# EAGLE board squematics (EAGLE 7.4.0)
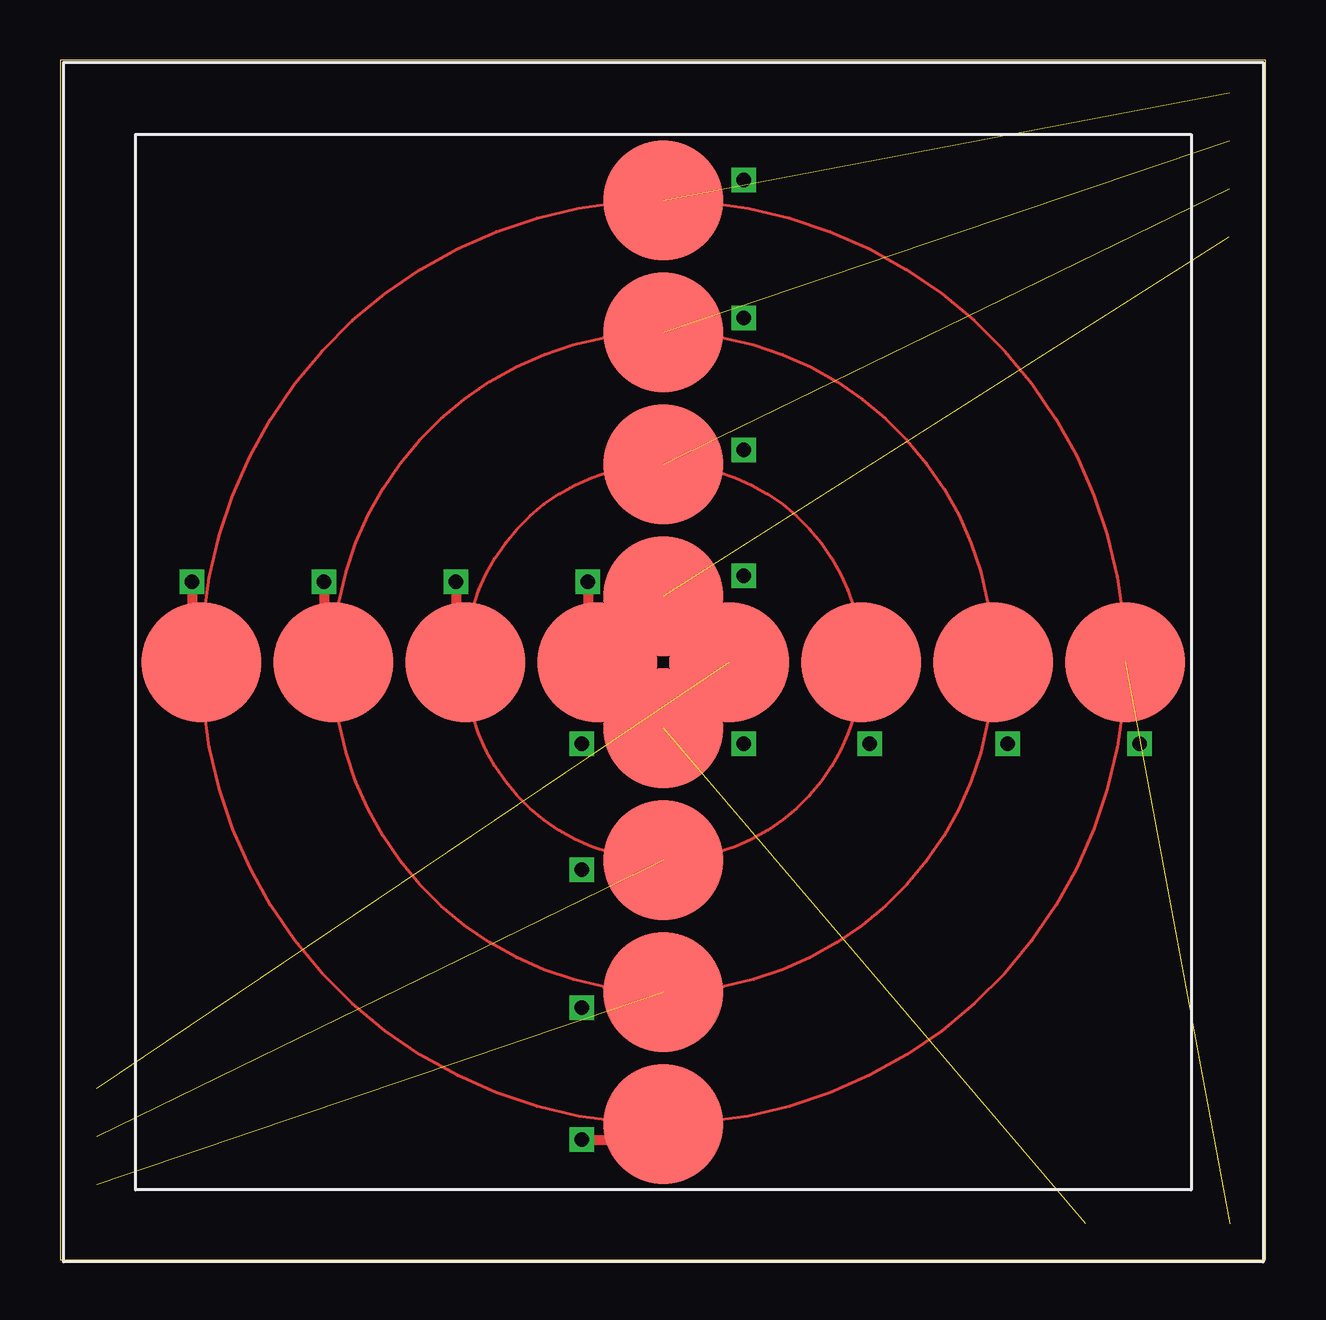
[diagram p0: board, top side]
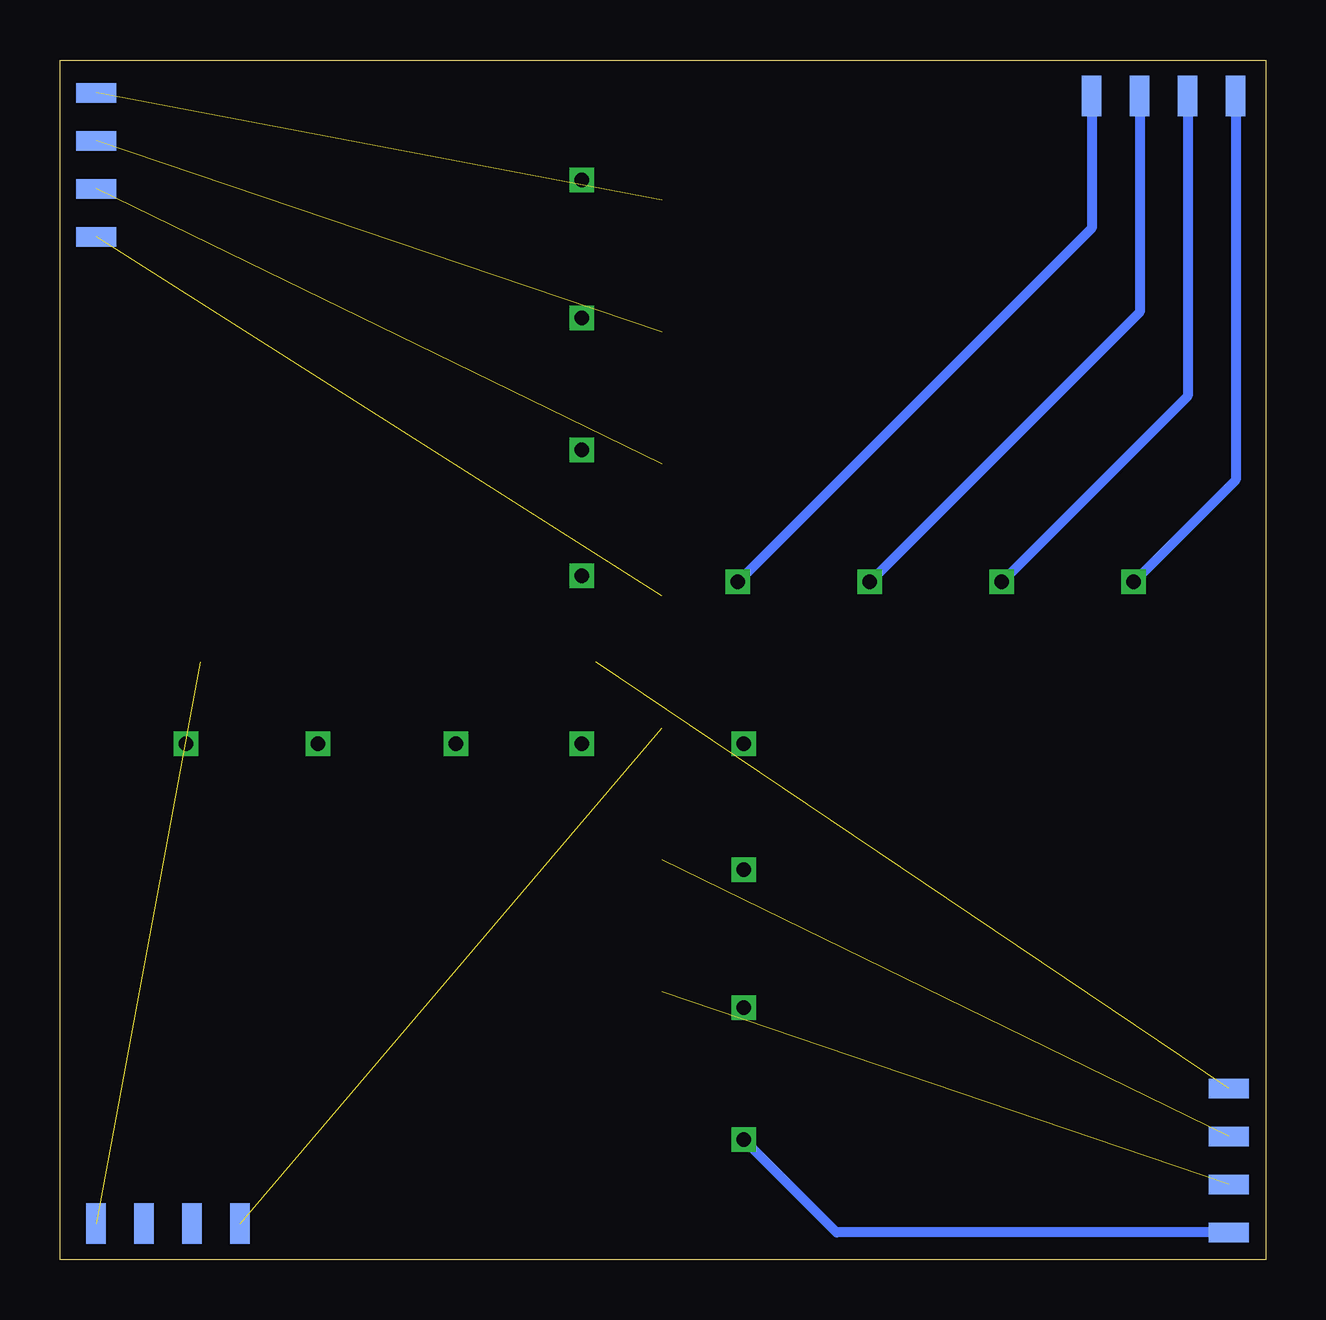
[diagram p1: board, bottom side, seen from below]

Size 50.25 x 50 mm. Coordinates in mm from the lower left corner, seen from the top.
Outline: 0,0 50.25,0 50.25,50 0,50 0,0
Copper layers (1*16): Top 0.035mm / dielectric 1.5mm / Bottom 0.035mm
Design rules "default": minimum track width 10mil, minimum drill 24mil, track to track 8mil, track to pad 8mil, pad to pad 8mil, via to via 8mil, smd to smd 8mil, copper to edge 40mil, drill to drill 8mil, minimum pad ring 10mil, minimum via ring 8mil, stop-mask expansion 4mil, vias tented up to drill 0mil, thermal gap 10mil

## Footprints (pad centres in the part's own frame; a part is rotated, then mirrored left to right if it is on the bottom)
FOUR_SIDE_PINS = smd 1.676 x 0.813: 5V 0,-4; GND 0,-2; SCL 0,2; SDA 0,0
CONNECTORS_PIN = smd 5 x 5: 5V_EAST 19.25,0; 5V_NORTH 0,19.25; 5V_SOUTH 0,-19.25; 5V_WEST -19.25,0; GND_EAST 13.75,0; GND_NORTH 0,13.75; GND_SOUTH 0,-13.75; GND_WEST -13.75,0; SDA_EAST 8.25,0; SDA_NORTH 0,8.25; SDA_SOUTH 0,-8.25; SDA_WEST -8.25,0; SLC_EAST 2.75,0; SLC_NORTH 0,2.75; SLC_SOUTH 0,-2.75; SLC_WEST -2.75,0

## Placement (x,y rotation side)
EAST  FOUR_SIDE_PINS  [FOUR_SIDE_PINS]  1.53,5.13 0 bottom
NORTH  FOUR_SIDE_PINS  [FOUR_SIDE_PINS]  48.74,44.63 180 bottom
U$1  CONNECTORS_PIN_DEVICE  [CONNECTORS_PIN]  25.15,24.9 0 top
U$2  FOUR_SIDE_PINS  [FOUR_SIDE_PINS]  5.25,48.5 90 bottom
U$3  FOUR_SIDE_PINS  [FOUR_SIDE_PINS]  44.75,1.5 270 bottom

## Library data of the parts
EAST NORTH U$2 U$3 = probatio_fourSidePins
U$1 = probatioBaseConnector

## Nets
N$1: NORTH.SCL U$1.SLC_NORTH
N$2: NORTH.SDA U$1.SDA_WEST
N$3: NORTH.GND U$1.GND_WEST
N$4: NORTH.5V U$1.5V_NORTH
N$5: EAST.SCL U$1.SLC_EAST
N$6: EAST.SDA U$1.SDA_EAST
N$7: EAST.GND U$1.GND_EAST
N$8: EAST.5V U$1.5V_EAST
N$9: U$1.5V_WEST U$2.5V
N$10: U$1.SLC_WEST U$2.SCL
N$11: U$1.SDA_SOUTH U$2.SDA
N$12: U$1.GND_SOUTH U$2.GND
N$13: U$1.5V_SOUTH U$3.5V
N$14: U$1.SLC_SOUTH U$3.SCL

## Tracks (layer width: path | path; a pad name or v marks a point on that pad's centre or on a via)
N$1  (1 unrouted)
N$2  (1 unrouted)
N$3  (1 unrouted)
N$4  (1 unrouted)
N$5  (1 unrouted)
N$6  (1 unrouted)
N$7  (1 unrouted)
N$8  (via drill 0.6)
  Top 0.406: v21.75,5 24.5,5 25.15,5.65
  Bottom 0.406: EAST.5V 17.88,1.13 v21.75,5
N$9  (via drill 0.6)
  Top 0.406: v5.5,28.25 5.5,25.3 U$1.5V_WEST
  Bottom 0.406: U$2.5V 1.25,32.5 v5.5,28.25
N$10  (via drill 0.6)
  Top 0.406: v22,28.25 22,25.3 U$1.SLC_WEST
  Bottom 0.406: U$2.SCL 7.25,43 v22,28.25
N$11  (via drill 0.6)
  Top 0.406: v16.5,28.25 16.5,25.3 16.9,24.9
  Bottom 0.406: U$2.SDA 5.25,39.5 v16.5,28.25
N$12  (via drill 0.6)
  Top 0.406: v11,28.25 11,25.3 11.4,24.9
  Bottom 0.406: U$2.GND 3.25,36 v11,28.25
N$13  (1 unrouted)
N$14  (1 unrouted)
N$17  (via drill 0.6)
  other vias: 28.5,45
N$18  (via drill 0.6)
  other vias: 28.5,39.25
N$19  (via drill 0.6)
  other vias: 28.5,33.75
N$20  (via drill 0.6)
  other vias: 28.5,28.5
N$21  (via drill 0.6)
  other vias: 45,21.5
N$22  (via drill 0.6)
  other vias: 39.5,21.5
N$23  (via drill 0.6)
  other vias: 33.75,21.5
N$24  (via drill 0.6)
  other vias: 28.5,21.5
N$25  (via drill 0.6)
  other vias: 21.75,5
N$26  (via drill 0.6)
  other vias: 21.75,10.5
N$27  (via drill 0.6)
  other vias: 21.75,16.25
N$28  (via drill 0.6)
  other vias: 21.75,21.5
N$30  (via drill 0.6)
  other vias: 16.5,28.25